# Altium PCB Starboard Deployable Solar Panel.PcbDoc (part 1 of 2)
Units mm, origin at the board's own origin, x right, y up, seen from the top; angles counter-clockwise.
Board outline 327.5 x 81 mm, 2 copper layers (Top Layer, Bottom Layer), stack 1.58 mm thick; 54 components, 32 nets, 176 pads, 1774 vias.
Unrouted connection lines stored in the file: 37.
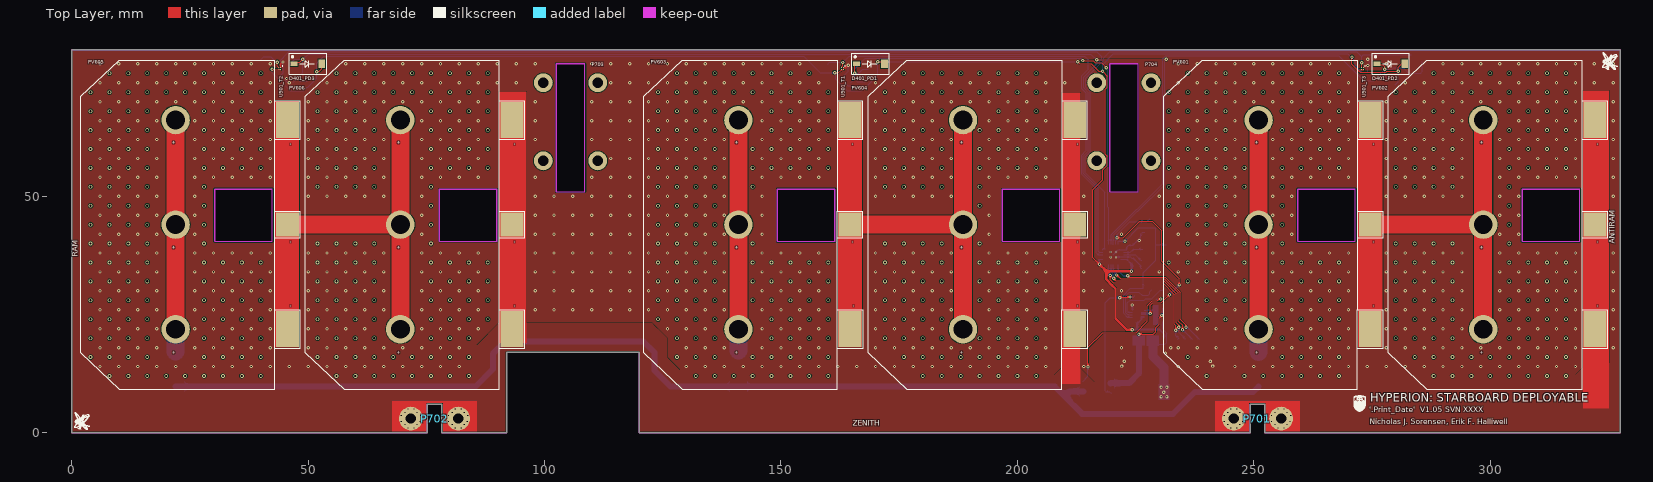
[diagram p0: Top Layer view]
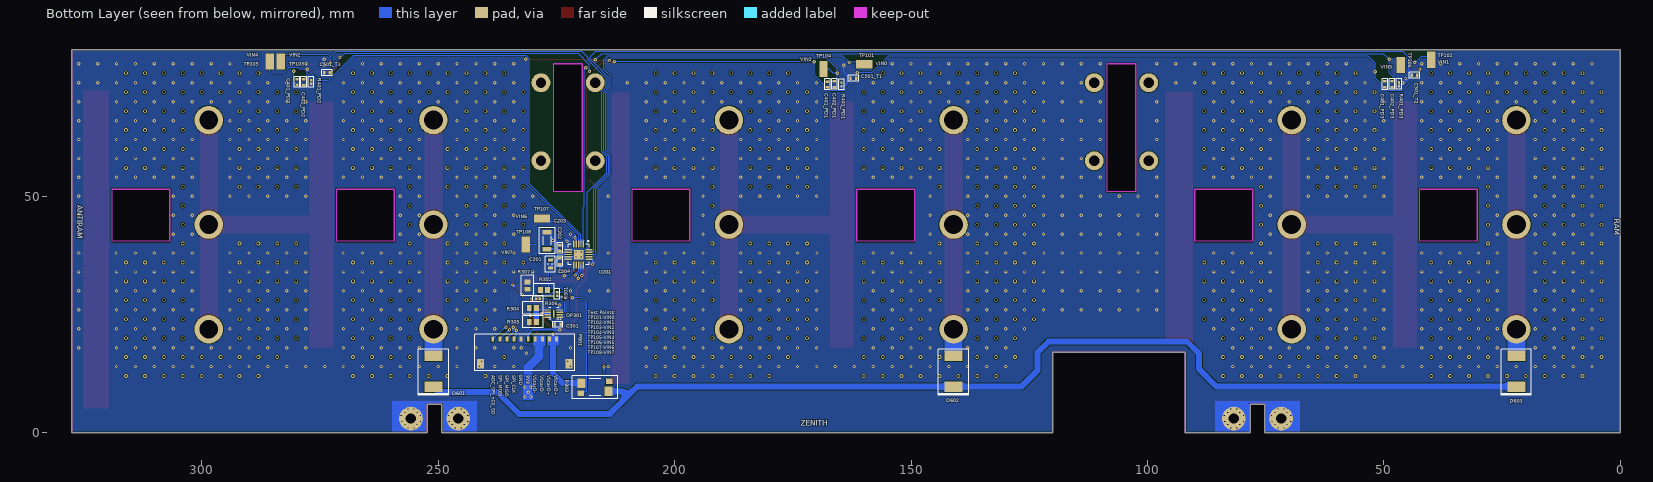
[diagram p1: Bottom Layer view, seen from below]

## Layer stack, top to bottom
Top Solder: solder mask 0.0102, Solder Resist, Dk 3.5
Top Layer: signal copper 0.0711
Dielectric 1: dielectric 1.438, FR-4, Dk 4.8
Bottom Layer: signal copper 0.0711
Bottom Solder: solder mask 0.0102, Solder Resist, Dk 3.5

## Board outline
92,0 92,17 120,17 120,0 249.25,0 249.25,6 252.25,6 252.25,0 327.5,0 327.5,81 0,81 0,0 75.25,0 75.25,6 78.25,6 78.25,0
cut-out: 102.5,80.997
cut-out: 318.9,51.5 306.75,51.5 306.75,40.5 318.9,40.5
cut-out: 271.4,51.5 259.25,51.5 259.25,40.5 271.4,40.5
cut-out: 208.9,51.5 196.75,51.5 196.75,40.5 208.9,40.5
cut-out: 161.4,51.5 149.25,51.5 149.25,40.5 161.4,40.5
cut-out: 89.9,51.5 77.75,51.5 77.75,40.5 89.9,40.5
cut-out: 42.4,51.5 30.25,51.5 30.25,40.5 42.4,40.5
cut-out: 225.5,51 225.5,78 219.5,78 219.5,51
cut-out: 108.5,51 108.5,78 102.5,78 102.5,51

## Design rules (kind name [scope] priority, off if disabled: settings)
BoardOutlineClearance [All] p1: gap=0.254 ignorepadtopadclearanceinfootprint=FALSE except(0: Arc-SplitContinuation Track-SplitContinuation SMDPad-SplitContinuation THPad-SplitContinuation Via-SplitContinuation Fill-SplitContinuation Poly-SplitContinuation Region-SplitContinuation Text-SplitContinuation)
Clearance [All] p1: gap=0.152 ignorepadtopadclearanceinfootprint=FALSE
HoleSize [All] p1: absolutevalues=TRUE maxlimit=6 minlimit=0.2 maxpercent=80.000 minpercent=20.000
MinimumAnnularRing [All] p1: minimumring=0.15
MinimumSolderMaskSliver [All] p1: minsoldermaskwidth=0.127
PlaneConnect [All] p1: planeconnectstyle=Direct reliefexpansion=0.508 reliefentries=4 reliefconductorwidth=0.254 reliefairgap=0.254
PolygonConnect [All] p1: connectstyle=Direct reliefconductorwidth=0.254 reliefentries=4 polygonreliefangle="90 Angle" airgapwidth=0.254
RoutingVias [All] p1: holewidth=0.33 width=0.711 viastyle="Through Hole" minholewidth=0.2 minwidth=0.35 maxholewidth=6.2 maxwidth=7
SilkToSilkClearance [All] p1: silktosilkclearance=0.102
SilkToSolderMaskClearance [IsPad] p1: minsilkscreentomaskgap=0.025 clearancetoexposedcopper=TRUE
SolderMaskExpansion [All] p1: expansion=0.102 istentingtop=FALSE
UnRoutedNet [All] p1: checkbadconnections=TRUE
Width [All] p1: maxlimit=7.62 minlimit=0.203 preferedwidth=0.254
24 further rules are at their usual default settings.

## Classes and differential pairs
component class PD3: C401_PD3 C402_PD3 D401_PD3 R401_PD3
component class PD2: C401_PD2 C402_PD2 D401_PD2 R401_PD2
component class PD1: C401_PD1 C402_PD1 D401_PD1 R401_PD1
channel class Temp_Sensor: T1 T2 T3
channel class Photodiode_Sun_Sensor: T1 T2 T3
component class "Starboard Deployable": TP101 TP102 TP103 TP104 TP105 TP106 TP107 TP108
component class "Starboard Deployable Headers": P801
component class "Photovoltaic Array": D601 D602 D603 PV601 PV602 PV603 PV604 PV605 PV606
component class "Mechanical Interfacing": P701 P702 P703 P704
component class T3: C501_T3 U501_T3
component class T2: C501_T2 U501_T2
component class T1: C501_T1 U501_T1
net class VIN[0..7]: VIN0 VIN1 VIN2 VIN3 VIN4 VIN5 VIN6 VIN7
component class "U_AD7298 12-Bit SPI ADC": C201 C202 C203 C204 U201
component class "Current and Voltage Sensors": C301 OP301 R301 R302 R303 R304 R305 R306 R307

## Components (designator, comment, footprint, x,y, rotation, side; value= is the part's Value field where it differs from the comment)
C201 "" TDK-CGA3E 226.26,35.64 r90 bottom value=1µF
C202 "" TDK-CGA2B 224.25,39.05 r90 bottom value=0.1µF
C203 "" TDK-CGA5L 226.95,40.6 r90 bottom value=10µF
C204 "" TDK-CGA2B 224.25,36.25 r90 bottom value=0.1µF
C301 "Cap" TDK-CGA2B 224.707,22.9 r0 bottom value=0.1µF
C401_PD1 "Cap" TDK-CGA2B 167.7,73.65 r270 bottom value=0.1µF (schematic designator C401)
C401_PD2 "Cap" TDK-CGA2B 279.85,74.165 r270 bottom value=0.1µF (schematic designator C401)
C401_PD3 "Cap" TDK-CGA2B 49.8,73.7 r270 bottom value=0.1µF (schematic designator C401)
C402_PD1 "Cap" TDK-CGA2B 166.2,73.7 r90 bottom value=100pF (schematic designator C402)
C402_PD2 "Cap" TDK-CGA2B 278.4,74.125 r90 bottom value=100pF (schematic designator C402)
C402_PD3 "Cap" TDK-CGA2B 48.3,73.7 r90 bottom value=100pF (schematic designator C402)
C501_T1 "Cap" TDK-CGA2B 162.2,74.95 r180 bottom value=0.1µF (schematic designator C501)
C501_T2 "Cap" TDK-CGA2B 43.55,75.6 r180 bottom value=0.1µF (schematic designator C501)
C501_T3 "Cap" TDK-CGA2B 273.475,76.12 r180 bottom value=0.1µF (schematic designator C501)
D401_PD1 "PDB-C160SMCT-ND" PDB-C160SM 166,78 r0 top (schematic designator D401)
D401_PD2 "PDB-C160SMCT-ND" PDB-C160SM 276,78 r0 top (schematic designator D401)
D401_PD3 "PDB-C160SMCT-ND" PDB-C160SM 47,78 r0 top (schematic designator D401)
D601 "MBRS410L" ONS-875 251,13 r270 bottom
D602 "MBRS410L" ONS-875 141,13 r270 bottom
D603 "MBRS410L" ONS-875 22,13 r270 bottom
OP301 "OPA2333" TI-DSG0008A 225.557,25.2 r0 bottom
P701 "Mounting_Hole" DEPHINGE_MOUNTING_HOLE 245.75,3 r0 top
P702 "Mounting_Hole" DEPHINGE_MOUNTING_HOLE 71.75,3 r0 top
P703 "Switch Depressor" SWITCH_DEPRESSOR 105.5,74 r180 top
P704 "Switch Depressor" SWITCH_DEPRESSOR 222.5,74 r180 top
P801 "WM10138CT-ND" MOLX-5040501091 231.7,19.8 r180 bottom
PV601 "XTJPrime" "XTJ PRIME" 251,44 r270 top
PV602 "XTJPrime" "XTJ PRIME" 298.5,44 r270 top
PV603 "XTJPrime" "XTJ PRIME" 141,44 r270 top
PV604 "XTJPrime" "XTJ PRIME" 188.5,44 r270 top
PV605 "XTJPrime" "XTJ PRIME" 22,44 r270 top
PV606 "XTJPrime" "XTJ PRIME" 69.5,44 r270 top
R301 "0.1% 1/16W" PANA-ERA2A 224.837,29.35 r90 bottom value=6.2k
R302 "0.1% 1/8W" PANA-ERA6A 227.607,30.2 r180 bottom value=1M
R303 "Res Sense" VSH-2512R4C 216.8,9.6 r0 bottom value=0.01
R304 "0.1% 1/8W" PANA-ERA6A 229.957,26.35 r180 bottom value=1M
R305 "0.1% 1/8W" PANA-ERA6A 229.957,23.45 r180 bottom value=845k
R306 "0.1% 1/16W" PANA-ERA2A 228.907,28.325 r180 bottom value=6.2k
R307 "0.1% 1/8W" PANA-ERA6A 231.121,31.1 r90 bottom value=1M
R401_PD1 "0.1% 1/16W" PANA-ERA2A 164.7,73.65 r90 bottom value=24k (schematic designator R401)
R401_PD2 "0.1% 1/16W" PANA-ERA2A 276.85,74.17 r90 bottom value=24k (schematic designator R401)
R401_PD3 "0.1% 1/16W" PANA-ERA2A 46.8,73.7 r90 bottom value=24k (schematic designator R401)
TP101 "5017" KS-5017 159.9,77.95 r180 bottom
TP102 "5017" KS-5017 40,78.85 r90 bottom
TP103 "5017" KS-5017 283.241,78.5 r90 bottom
TP104 "5017" KS-5017 168.5,76.9 r90 bottom
TP105 "5017" KS-5017 285.621,78.5 r90 bottom
TP106 "5017" KS-5017 46.45,77.75 r90 bottom
TP107 "5017" KS-5017 228.052,45.3 r180 bottom
TP108 "5017" KS-5017 231.5,39.772 r270 bottom
U201 "AD7298" ADI-CP-20-8 220.29,37.68 r270 bottom
U501_T1 "LMT70" TI-YFQ0004 163,77 r270 top (schematic designator U501)
U501_T2 "LMT70" TI-YFQ0004 44,77 r270 top (schematic designator U501)
U501_T3 "LMT70" TI-YFQ0004 273,77 r270 top (schematic designator U501)

## Footprints (in the part's own frame and the unit in brackets; to place one, negate y for a bottom-side part, rotate by r counter-clockwise, add the part's x,y. Pads: shape width x height; smd on the part's side, far side on the other; paste and mask are expansions set on the pad)
ADI-CP-20-8 [mm] "QFN, 20-Leads, Body 4.00x4.00mm, Pitch 0.50mm, Thermal Pad 2.55x2.55mm, IPC Low Density"
  rect 1.5x0.3 smd: 1(-2.2,1) 2(-2.2,0.5) 3(-2.2,0) 4(-2.2,-0.5) 5(-2.2,-1) 11(2.2,-1) 12(2.2,-0.5) 13(2.2,0) 14(2.2,0.5) 15(2.2,1)
  rect 0.3x1.5 smd: 6(-1,-2.2) 7(-0.5,-2.2) 8(0,-2.2) 9(0.5,-2.2) 10(1,-2.2) 16(1,2.2) 17(0.5,2.2) 18(0,2.2) 19(-0.5,2.2) 20(-1,2.2)
  rect 2x2 smd: 21(0,0)
  silkscreen extent -2.97,-2.2 2.2,2.2, body extent -2.07,-2.07 2.07,2.07, height 0.8
DEPHINGE_MOUNTING_HOLE [mm]
  round 5 hole 2.2: 1(0,0) 1(10,0)
  Top Layer region: 3.2,-3.2
  Top Layer region: 3.2,-2.7 3.2,3.3 6.8,3.3 6.8,-2.7 13.9,-2.7 13.9,3.8 -3.9,3.8 -3.9,-2.7
  Bottom Layer region: 3.2,-2.7 3.2,3.3 6.8,3.3 6.8,-2.7 13.9,-2.7 13.9,3.8 -3.9,3.8 -3.9,-2.7
KS-5017 [mil] "Testpoint Lug Mini SMD 27X10X152"
  rect 135x70 smd: 1(0,0)
  body extent -53,-20 53,20, height 60
MOLX-5040501091 [mm]
  rect 0.6x1 smd: 1(-6.75,0) 2(-5.25,0) 3(-3.75,0) 4(-2.25,0) 5(-0.75,0) 6(0.75,0) 7(2.25,0) 8(3.75,0) 9(5.25,0) 10(6.75,0)
  oval 0.711x0.711 hole 0.33: M1(-9.605,-5.7) M1(-9.105,-4.7) M2(9.105,-4.7) M2(9.605,-5.7)
  rect 1.5x2 smd: M1(-9.355,-5.2) M2(9.355,-5.2)
  silkscreen extent -10.6,-6.7 10.6,1, body extent -9.77,-6.05 9.78,0.39, height 2.01
ONS-875 [mm]
  rect 2.25x3.79 smd: 1(-3.25,0) 2(3.25,0)
  silkscreen extent -4.7,-3.2 5.1,3.2, body extent -3.98,-2.95 3.98,2.95, height 2.32
PANA-ERA2A [mm] "Chip Resistor, 2-Leads, Body 1.00x0.52mm, IPC High Density"
  rect 0.57x0.5 smd: 1(-0.375,0) 2(0.375,0)
  silkscreen extent -1.1,-0.6 1.1,0.6, body extent -0.55,-0.3 0.55,0.3, height 0.4
PANA-ERA6A [mm] "Chip Resistor, 2-Leads, Body 2.00x1.25mm, IPC High Density"
  rect 1x1.25 smd: 1(-0.75,0) 2(0.75,0)
  silkscreen extent -2.15,-1.3 2.15,1.3, body extent -1.1,-0.67 1.1,0.67, height 0.6
PDB-C160SM [mm] "Photodiode"
  rect 1.45x1 smd: 1(0,0)
  rect 1.45x1.8 smd: 2(5.9,0)
  silkscreen extent -1,-2.2 6.9,2.2
SWITCH_DEPRESSOR [mm]
  round 4 hole 2.2: 10(-5.75,0) 10(5.75,0)
  body extent -7.75,-1.99 7.75,6.81, height 16.47
TDK-CGA2B [mm] "Chip Capacitor, 2-Leads, Body 1.00x0.50mm, IPC Low Density"
  rect 0.52x0.72 smd: 1(-0.6,0) 2(0.6,0)
  silkscreen extent -1.1,-0.6 1.1,0.6, body extent -0.52,-0.28 0.53,0.27, height 0.5
TDK-CGA3E [mm] "Chip Capacitor, 2-Leads, Body 1.60x0.80mm, IPC Low Density"
  rect 0.65x1.05 smd: 1(-0.85,0) 2(0.85,0)
  silkscreen extent -1.7,-1.05 1.7,1.05, body extent -0.85,-0.45 0.85,0.45, height 0.8
TDK-CGA5L [mm] "Chip Capacitor, 2-Leads, Body 3.20x1.60mm, IPC Low Density"
  rect 0.95x1.9 smd: 1(-1.775,0) 2(1.775,0)
  silkscreen extent -2.75,-1.7 2.75,1.7, body extent -1.7,-0.9 1.7,0.9, height 1.6
TI-DSG0008A [mm] "SON, 8-Leads, Body 2.00x2.00mm, Pitch 0.50mm, Thermal Pad 1.60x0.69mm, IPC Low Density"
  rect 1.4x0.3 smd: 1(-1.245,0.75) 2(-1.245,0.25) 3(-1.245,-0.25) 4(-1.245,-0.75) 5(1.245,-0.75) 6(1.245,-0.25) 7(1.245,0.25) 8(1.245,0.75)
  rect 0.4x1.6 smd: 9(0,0)
  silkscreen extent -1.5,-1.2 1.05,1.25, body extent -1.05,-1.05 1.05,1.05, height 0.8
TI-YFQ0004 [mm] "BGA, 4-Leads, Body 0.88x0.88mmx0.68mm, Pitch 0.40mm"
  round 0.21 smd: A1(-0.2,0.2) A2(0.2,0.2) B1(-0.2,-0.2) B2(0.2,-0.2)
  silkscreen extent -0.59,0.5 -0.5,0.6, body extent -0.44,-0.44 0.44,0.44, height 0.67
VSH-2512R4C [mm]
  rect 1.65x2.01 smd: 1(-2.855,0.835) 2(2.855,-0.835)
  rect 1.39x1.14 smd: 3(2.999,1.27) 4(-2.999,-1.27)
  silkscreen extent -4.8,-2.45 4.8,2.45
"XTJ PRIME" [mil] "Spectrolab Solar Cell"
  round 236.22 hole 157.48: 1(-870.5,0) 1(0,0) 1(870.5,0)
  rect 300x190 smd: 2(-870.5,930) 2(870.5,930)
  rect 200x190 smd: 2(0,930)
  silkscreen extent -1369,-790 1369,1038, body extent -1356,-778 1356,778, height 13

## Part data
C201: library part PC-TDK-02603, "CAP CER 1UF 25V X7R 0603", Manufacturer Part Number=CGA3E1X7R1E105K080AC, Supplier Part Number 1=445-6931-1-ND, Temperature Coefficient=X7R, Tolerance=±10%, Voltage - Rated=25V, Applications=Automotive, Index=2603, LatestRevisionDate=3/16/2016, LatestRevisionNote=..., PackageReference="0603 (1608 Metric)", Part Number=PC-TDK-02603, Published=3/16/2016, Publisher=AlbertaSat, Supplier 1=Digi-key, Supplier Link=http://www.digikey.ca/product-search/en?keywords=445-6931-1-ND
C202 C204 C401_PD1 C401_PD2 C401_PD3 C501_T1 C501_T2 C501_T3: library part PC-TDK-02259, "CAP CER 0.1UF 50V X7R 0402", Manufacturer Part Number=CGA2B3X7R1H104K050BB, Supplier Part Number 1=445-6899-1-ND, Temperature Coefficient=X7R, Tolerance=±10%, Voltage - Rated=50V, Applications=Automotive, Index=2259, LatestRevisionNote=..., PackageReference="0402 (1005 Metric)", Part Number=PC-TDK-02259, Publisher=AlbertaSat, Supplier 1=Digi-key, Supplier Link=http://www.digikey.ca/product-search/en?keywords=445-6899-1-ND
  C202 C204: LatestRevisionDate=3/16/2016, Published=3/16/2016
  C401_PD1 C401_PD2 C401_PD3 C501_T1 C501_T2 C501_T3: LatestRevisionDate=2016-03-16, PackageDescription="Radial Cap, Thru-Hole; 2 Leads; 0.3 in Pin Spacing", Published=2016-03-16
C203: library part PC-TDK-02917, "CAP CER 10UF 25V X7R 1206", Manufacturer Part Number=CGA5L1X7R1E106K160AC, Supplier Part Number 1=445-6990-1-ND, Temperature Coefficient=X7R, Tolerance=±10%, Voltage - Rated=25V, Applications=Automotive, Index=2917, LatestRevisionDate=3/16/2016, LatestRevisionNote=..., PackageReference="1206 (3216 Metric)", Part Number=PC-TDK-02917, Published=3/16/2016, Publisher=AlbertaSat, Supplier 1=Digi-key, Supplier Link=http://www.digikey.ca/product-search/en?keywords=445-6990-1-ND
C301: library part PC-TDK-02255, "CAP CER 0.1UF 35V X7R 0402", Manufacturer Part Number=CGA2B3X7R1V104K050BB, Supplier Part Number 1=445-6901-1-ND, Temperature Coefficient=X7R, Tolerance=±10%, Voltage - Rated=35V, Applications=Automotive, Index=2255, LatestRevisionDate=2016-03-16, LatestRevisionNote=..., PackageDescription="Radial Cap, Thru-Hole; 2 Leads; 0.3 in Pin Spacing", PackageReference="0402 (1005 Metric)", Part Number=PC-TDK-02255, Published=2016-03-16, Publisher=AlbertaSat, Supplier 1=Digi-key, Supplier Link=http://www.digikey.ca/product-search/en?keywords=445-6901-1-ND
C402_PD1 C402_PD2 C402_PD3: library part PC-TDK-01227, "CAP CER 100PF 50V C0G 0402", Manufacturer Part Number=CGA2B2C0G1H101J050BA, Supplier Part Number 1=445-5596-1-ND, Temperature Coefficient=NP0, Tolerance=±5%, Voltage - Rated=50V, Applications=Automotive, Index=1227, LatestRevisionDate=2016-03-16, LatestRevisionNote=..., PackageDescription="Radial Cap, Thru-Hole; 2 Leads; 0.3 in Pin Spacing", PackageReference="0402 (1005 Metric)", Part Number=PC-TDK-01227, Published=2016-03-16, Publisher=AlbertaSat, Supplier 1=Digi-key, Supplier Link=http://www.digikey.ca/product-search/en?keywords=445-5596-1-ND
D401_PD1 D401_PD2 D401_PD3: library part PXX-ADP-00000, "SENSOR PHOTODIODE 850NM 2SMD GW", Manufacturer Part Number="Advanced Photonics", Index=1, LatestRevisionDate=3/28/2020, LatestRevisionNote=..., PackageReference=PIN2, Part Number=PXX-ADP-00000, Published=3/28/2020, Publisher=AlbertaSat, Supplier 1=Digi-key, Supplier Part Number 1=PDB-C160SMCT-ND
D601 D602 D603: library part PXX-ONS-00003, "SCHOTTKY BARRIER / RECTIFIERS / 4.0 AMPERES, 10 VOLTS, V_F = 0.31V", Supplier Part Number 1=MBRS410LT3-D, Code_JEDEC=DO-214-AA, Index=3, LatestRevisionDate=1/18/2020, LatestRevisionNote=..., Manufacturer Part Number=MBRS410L, PackageDescription="DO-214-AA/SMB; 2 C-Bend Leads; Body 5.3 x 3.6 mm, inc. leads (LxW)", PackageReference=SMB, Part Number=PXX-ONS-00003, Published=1/18/2020, Publisher=AlbertaSat, Supplier 1=Digi-key, Supplier Link=#https://www.digikey.com/product-detail/en/on-semiconductor/MBRS410LT3G/MBRS410LT3GOSCT-ND/1967073#
OP301: library part 73, "CMOS Amplifier 2 Circuit Rail-to-Rail 8-WSON (2x2)", Manufacturer Part Number=OPA2333PIDSGR, Operating Temperature="-55°C ~ 150°C", Supplier Part Number 1=296-51501-1-ND, Voltage - Supply="1.8V ~ 5.5V, ±0.9V ~ 2.75V", PackageReference="8-WFDFN Exposed Pad", Part Number=73, Supplier 1=Digi-Key, Supplier 2=Mouser, Supplier Link=#https://www.digikey.ca/product-detail/en/texas-instruments/OPA2333PIDSGR/296-51501-1-ND/9745865#, Supplier Part Number 2=595-OPA2333PIDSGR
P701 P702: library part PXX-ABS-00003, "Depolyable Hinge Mounting hole.", Manufacturer Part Number=N/A, Index=3, LatestRevisionNote=..., PackageReference=P?, Part Number=PXX-ABS-00003, Publisher=AlbertaSat, Supplier 1=N/A, Supplier Part Number 1=N/A
P703 P704: library part PXX-ABS-00005, "Hardware for depressing the switch", Manufacturer Part Number=Custom, Index=5, LatestRevisionNote=..., Part Number=PXX-ABS-00005, Publisher=AlbertaSat, Supplier 1=Digi-key
P801: library part 69, "CONN HEADER SMD R/A 10POS 1.5MM", Manufacturer Part Number=5040501091, LatestRevisionDate=17-Jul-2002, LatestRevisionNote="Re-released for DXP Platform.", Part Number=69, Publisher="Altium Limited", Supplier 1=Digi-Key, Supplier Link=#https://www.digikey.ca/product-detail/en/molex/5040501091/WM10138CT-ND/4357655#, Supplier Part Number 1=WM10138CT-ND
PV601 PV602 PV603 PV604 PV605 PV606: library part PBT-SPEC-00002, Manufacturer Part Number=Spectrolab, Supplier Part Number 1="UTJ CIC 26.26cm^2", Index=2, LatestRevisionNote=..., PackageReference="3-Connector Solar Cell", Part Number=PBT-SPEC-00002, Publisher=AlbertaSat, Supplier 1=Spectrolab
R301 R306: library part 16853, "RES SMD 6.2K OHM 0.1% 1/16W 0402", Manufacturer Part Number=ERA-2APB622X, Power="0.063W, 1/16W", Supplier Part Number 1=P6.2KCNCT-ND, Temperature Coefficient=±15ppm/°C, Tolerance=±0.1%, LatestRevisionDate=29-May-2009, LatestRevisionNote="IPC-7351 Footprint Added.", PackageDescription="Chip Resistor, 2-Leads, Body 1.00x0.50mm, IPC Low Density", PackageReference="0402 (1005 Metric)", Part Number=16853, Published=8-Jun-2000, Publisher="Altium Limited", Supplier 1=Digi-Key, Supplier Link=http://www.digikey.ca/product-search/en?keywords=P6.2KCNCT-ND
R302 R304 R307: library part 19706, "RES SMD 1M OHM 0.1% 1/8W 0805", Manufacturer Part Number=ERA-6AEB105V, Power="0.125W, 1/8W", Supplier Part Number 1=P1MDACT-ND, Temperature Coefficient=±25ppm/°C, Tolerance=±0.1%, LatestRevisionDate=29-May-2009, LatestRevisionNote="IPC-7351 Footprint Added.", PackageDescription="Chip Resistor, 2-Leads, Body 2.00x1.25mm, IPC Low Density", PackageReference="0805 (2012 Metric)", Part Number=19706, Published=8-Jun-2000, Publisher="Altium Limited", Supplier 1=Digi-Key, Supplier Link=http://www.digikey.ca/product-search/en?keywords=P1MDACT-ND
R303: library part PR-VSH-00237, "RES SMD 0.01 OHM 0.1% 1W 2512", Manufacturer Part Number=Y14870R01000B9W, Power - Rated=1W, Supplier Part Number 1=Y1487-.01-ND, Temperature Coefficient=±15ppm/°C, Tolerance=±0.1%, Applications=Automotive, Index=237, LatestRevisionDate=2017-07-12, LatestRevisionNote=..., PackageReference=VSH-2512R4C, Part Number=PR-VSH-00237, Published=2017-07-12, Publisher=AlbertaSat, Supplier 1=Digi-key, Supplier Link=http://www.digikey.ca/product-search/en?keywords=Y1487-.01-ND
R305: library part 19643, "RES SMD 845K OHM 0.1% 1/8W 0805", Manufacturer Part Number=ERA-6AEB8453V, Power="0.125W, 1/8W", Supplier Part Number 1=P845KDACT-ND, Temperature Coefficient=±25ppm/°C, Tolerance=±0.1%, LatestRevisionDate=29-May-2009, LatestRevisionNote="IPC-7351 Footprint Added.", PackageDescription="Chip Resistor, 2-Leads, Body 2.00x1.25mm, IPC Low Density", PackageReference="0805 (2012 Metric)", Part Number=19643, Published=8-Jun-2000, Publisher="Altium Limited", Supplier 1=Digi-Key, Supplier Link=http://www.digikey.ca/product-search/en?keywords=P845KDACT-ND
R401_PD1 R401_PD2 R401_PD3: library part 17830, "RES SMD 24K OHM 0.1% 1/16W 0402", Manufacturer Part Number=ERA-2APB243X, Power="0.063W, 1/16W", Supplier Part Number 1=P24KCNCT-ND, Temperature Coefficient=±15ppm/°C, Tolerance=±0.1%, LatestRevisionDate=29-May-2009, LatestRevisionNote="IPC-7351 Footprint Added.", PackageDescription="Chip Resistor, 2-Leads, Body 1.00x0.50mm, IPC Low Density", PackageReference="0402 (1005 Metric)", Part Number=17830, Published=8-Jun-2000, Publisher="Altium Limited", Supplier 1=Digi-Key, Supplier Link=http://www.digikey.ca/product-search/en?keywords=P24KCNCT-ND
TP101 TP102 TP103 TP104 TP105 TP106 TP107 TP108: library part PTP-KS-00001, "PC TEST POINT MINI SMD", Supplier Part Number 1=36-5017CT-ND, Index=1, LatestRevisionDate=3/15/2016, LatestRevisionNote=..., Manufacturer Part Number=5017, PackageDescription="Testpoint Lug Mini SMD 27X10X152", PackageReference=KS-5017, Part Number=PTP-KS-00001, Published=3/15/2016, Publisher=AlbertaSat, Supplier 1=Digi-key, Supplier 2=Newark, Supplier 3=Mouser, Supplier Link=http://www.digikey.ca/product-detail/en/keystone-electronics/5017/36-5017TR-ND/2217304
U201: library part PU-ADI-00007, "IC ADC 12BIT SAR 20LFCSP-WQ", Manufacturer Part Number=AD7298BCPZ, Supplier Part Number 1=AD7298BCPZ-ND, Index=7, LatestRevisionDate=7/16/2019, LatestRevisionNote=..., PackageDescription="QFN, 20-Leads, Body 4.00x4.00mm, Pitch 0.50mm, Thermal Pad 2.55x2.55mm, IPC Low Density", PackageReference="20-WFQFN Exposed Pad", Part Number=PU-ADI-00007, Published=7/16/2019, Publisher=AlbertaSat, Supplier 1=Digi-key, Supplier 2=Mouser, Supplier Link=#https://www.digikey.ca/product-detail/en/analog-devices-inc/AD7298BCPZ/AD7298BCPZ-ND/2507320#, Supplier Part Number 2=584-AD7298BCPZ
U501_T1 U501_T2 U501_T3: library part 70, "Temperature Sensor Analog, Local -55°C ~ 150°C 5.194mV/°C 4-DSBGA (0.81x0.81)", Manufacturer Part Number=LMT70YFQR, Operating Temperature="-55°C ~ 150°C", Supplier Part Number 1=296-47337-1-ND, PackageReference="BGA, 4-Leads, Body 0.88x0.88mmx0.68mm, Pitch 0.40mm", Part Number=70, Supplier 1=Digi-Key, Supplier Link=#https://www.digikey.ca/product-detail/en/texas-instruments/LMT70YFQR/296-47337-1-ND/7688347#

## Free pads (board coordinates)
  round 4 hole 2.2: 3(99.75,57.5) 3(111.25,57.5) 3(216.75,57.5) 3(228.25,57.5)

## Via types
v1: diameter 0.711, hole 0.3, Top Layer to Bottom Layer, tented both sides, 995 vias
v2: diameter 0.8, hole 0.5, Top Layer to Bottom Layer, 727 vias
v3: diameter 0.655, hole 0.25, Top Layer to Bottom Layer, 48 vias
v4: diameter 0.5, hole 0.2, Top Layer to Bottom Layer, 4 vias

## Nets (pads, with @x,y where several pads share a name; then routed paths per layer and width w, separated by ;. In a path a pad name is that pad's centre, name@x,y a point inside that pad or via, vN(x,y) a via of type N, cw(c..) or ccw(c..) an arc to the next point about the centre after c; other vN are vias at no path point)
3V3: C204.1 C301.2 C401_PD1.2 C401_PD2.2 C401_PD3.2 C501_T1.2 C501_T2.2 C501_T3.2 D401_PD1.2 D401_PD2.2 D401_PD3.2 OP301.8 P801.6 U201.10 U201.16 U501_T1.A2 U501_T1.B2 U501_T2.A2 U501_T2.B2 U501_T3.A2 U501_T3.B2 | length 362.2
  Top Layer w0.203: v1(42.384,76.865) 42.449,76.8 U501_T2.B2 U501_T2.A2 ; v1@161.25,76.15 v1(161.35,76.15) 162.15,76.15 U501_T1.B2 U501_T1.A2 ; 270.75,78.742 v1(270.75,79.4) ; 271.9,76.8 271.905,76.8 U501_T3.B2 U501_T3.A2
  Top Layer w0.254: v1(51.8,76.35) 51.887,76.437 52.387,76.437 52.9,76.95 D401_PD3.2 ; v1(170.497,78.429) 171.471,78.429 D401_PD1.2 ; v1(212.77,78.429) 213.199,78 215.6,78 217.2,76.4 v1(218,76.4) 219.029,75.37 219.029,73.056 218.621,72.648 218.621,58.852 219.029,58.444 219.029,56.556 218.056,55.583 218.056,53.506 215.95,51.4 215.95,37 v1(217.35,35.6) ; 270.75,78.742 270.75,77.955 271.905,76.8 272.491,76.214 277.963,76.214 278.149,76.4 280.55,76.4 280.55,77.25 281.3,78 D401_PD2.2
  Top Layer w0.508: v1(217.35,35.6) 218.8,34.15 ; v1(224.117,34.15) 218.8,34.15 ; v1(224.307,21.8) 223.1,21.8 220.744,24.156 220.744,30.456 220.033,31.167 220.031,31.167 218.8,32.398 218.8,34.15
  Bottom Layer w0.254: v1(42.384,76.865) 42.384,76.116 42.875,75.625 42.925,75.625 C501_T2.2 44.642,73.908 44.642,73.858 46.2,72.3 48.95,72.3 49.75,73.1 49.9,73.1 51.8,75 v1(51.8,76.35) 51.8,78.11 53.318,79.628 154.85,79.628 158.328,76.15 v1(161.35,76.15) 161.35,76.026 161.6,75.776 161.6,74.7 164,72.3 167.025,72.3 167.775,73.05 167.875,73.05 170.497,75.672 v1(170.497,78.429) v1(212.77,78.429) ; 217.25,36.5 217.25,36.678 218.088,36.678 U201.16 ; v1(218,76.4) 218,77.841 220.302,80.144 264.933,80.144 269.856,80.144 v1@270.675,79.325 ; U201.10@221.895,36.682 221.897,36.68 U201.10 223.111,36.68 224.008,35.783 224.117,35.783 C204.1 C204.1@224.184,35.584 ; v1(224.117,34.15) v1@224.184,34.217 ; v1(270.75,79.4) 270.75,79.25 271.45,78.55 271.45,77.645 272.85,76.245 C501_T3.2@272.85,76.1 ; C401_PD2.2 280.55,74.265 v1(280.55,76.465)
  Bottom Layer w0.381: v1(224.307,21.8) 225.307,21.8 ; OP301.8 226.231,24.45 226.229,24.448 226.229,24.005 225.307,23.083 C301.2 225.307,21.8 ; P801.6@231.05,20 231.05,20.85 230.1,21.8 225.307,21.8
  Bottom Layer w0.508: 217.25,36.5 217.25,35.7 v1(217.35,35.6) ; v1@224.184,34.217 C204.1@224.184,35.584
ADC_SPI_nCS_SD: P801.1 U201.11 | length 28.2
  Top Layer w0.254: v1@223.167,33.35 v1(223.317,33.2) 223.598,32.919 231.23,32.919 234.426,29.723 234.426,23.974 235.65,22.75 v1(235.65,22.3)
  Bottom Layer w0.254: U201.11 221.29,34.26 222.35,33.2 v1(223.317,33.2) ; v1(235.65,22.3) 235.95,22.3 P801.1
GND: C201.1 C202.2 C203.2 C204.2 C301.1 C402_PD1.1 C402_PD2.1 C402_PD3.1 C501_T1.1 C501_T2.1 C501_T3.1 OP301.4 P801.5 P801.M1 P801.M2 R307.2 R401_PD1.1 R401_PD2.1 R401_PD3.1 U201.6 U201.9 U201.21 U501_T1.A1 U501_T2.A1 U501_T3.A1 | length 39.1
  Top Layer w0.203: U501_T2.A1 44.2,77.976 44.6,78.376 v1@44.6,78.5 ; U501_T1.A1 163.708,77.2 164.208,77.7 v1(164.25,77.7)
  Bottom Layer w0.254: v1(44.7,78.4) 44.7,76.1 44.2,75.6 44.2,75.5 46.5,73.2 46.703,73.2 46.85,73.347 46.85,73.325 46.962,73.212 48.238,73.212 C402_PD3.1@48.35,73.1 ; v1(164.25,77.7) 164.25,76.4 C501_T1.1 162.8,74.7 164.144,73.356 164.693,73.356 164.887,73.163 166.162,73.163 C402_PD1.1@166.275,73.05 ; U201.21 221.29,38.68 U201.6 223.111,38.68 223.113,38.682 223.113,39.254 223.509,39.65 C202.2 224.35,39.65 226.127,41.427 226.127,42.027 226.475,42.375 C203.2 ; v4(220.84,37.13) 220.89,37.18 U201.9 223.82,37.18 224.15,36.85 C204.2 224.53,36.85 226.06,35.32 226.06,34.79 C201.1 C201.1@226.29,34.76 ; v1(224.307,27) 224.307,25.952 224.309,25.95 OP301.4 ; C501_T3.1@274.05,76.1 v1(274.05,77.65) 274.45,78.05 274.45,79
  other v1: 6,14 10,14 14,14 18,14 22,14 26,14 30,14 34,14 38,14 42,14 46,14 50,14 54,14 58,14 62,14 66,14 70,14 74,14 78,14 82,14 130,14 134,14 138,14 142,14 146,14 150,14 154,14 158,14 162,14 166,14 170,14 174,14 178,14 182,14 186,14 190,14 194,14 198,14 202,14 206,14 214,14 234,14 238,14 246,14 250,14 254,14 258,14 262,14 266,14 270,14 274,14 278,14 282,14 286,14 290,14 294,14 298,14 302,14 306,14 310,14 314,14 318,14 231.3,16.8 232.398,17.95 6,18 10,18 14,18 18,18 26,18 30,18 34,18 38,18 42,18 50,18 54,18 58,18 62,18 66,18 70,18 74,18 78,18 82,18 130,18 134,18 138,18 146,18 150,18 154,18 158,18 170,18 174,18 178,18 182,18 186,18 190,18 194,18 198,18 202,18 206,18 222,18 234,18 238,18 242,18 246,18 254,18 258,18 262,18 266,18 270,18 278,18 282,18 286,18 290,18 294,18 298,18 302,18 306,18 310,18 314,18 318,18 326,18 6,22 10,22 14,22 18,22 26,22 30,22 34,22 38,22 42,22 50,22 54,22 58,22 62,22 74,22 78,22 82,22 86,22 126,22 130,22 134,22 146,22 150,22 154,22 158,22 170,22 174,22 178,22 182,22 194,22 198,22 202,22 206,22 238,22 242,22 246,22 258,22 262,22 266,22 270,22 278,22 282,22 286,22 290,22 294,22 306,22 310,22 314,22 318,22 326,22 6,26 10,26 14,26 18,26 26,26 30,26 34,26 38,26 42,26 50,26 54,26 58,26 62,26 66,26 74,26 78,26 82,26 86,26 98,26 102,26 106,26 110,26 114,26 118,26 122,26 126,26 130,26 134,26 138,26 146,26 150,26 154,26 158,26 170,26 174,26 178,26 182,26 186,26 194,26 198,26 202,26 206,26 238,26 242,26 246,26 254,26 258,26 262,26 266,26 270,26 278,26 282,26 286,26 290,26 294,26 302,26 306,26 310,26 314,26 318,26 326,26 6,30 10,30 14,30 18,30 26,30 30,30 34,30 38,30 42,30 50,30 54,30 58,30 62,30 66,30 74,30 78,30 82,30 86,30 98,30 102,30 106,30 110,30 114,30 118,30 122,30 126,30 130,30 134,30 138,30 146,30 150,30 154,30 158,30 170,30 174,30 178,30 182,30 186,30 194,30 198,30 202,30 206,30 214,30 218,30 222,30 238,30 242,30 246,30 254,30 258,30 262,30 266,30 270,30 278,30 282,30 286,30 290,30 294,30 302,30 306,30 310,30 314,30 318,30 326,30 6,34 10,34 14,34 18,34 26,34 30,34 34,34 38,34 42,34 50,34 54,34 58,34 62,34 66,34 74,34 78,34 82,34 86,34 98,34 102,34 106,34 110,34 114,34 118,34 122,34 126,34 130,34 134,34 138,34 146,34 150,34 154,34 158,34 170,34 174,34 178,34 182,34 186,34 194,34 198,34 202,34 206,34 214,34 230,34 234,34 238,34 242,34 246,34 254,34 258,34 262,34 266,34 270,34 278,34 282,34 286,34 290,34 294,34 302,34 306,34 310,34 314,34 318,34 326,34 6,38 10,38 14,38 18,38 26,38 30,38 34,38 38,38 42,38 50,38 54,38 58,38 62,38 66,38 74,38 78,38 82,38 86,38 98,38 102,38 106,38 110,38 114,38 118,38 122,38 126,38 130,38 134,38 138,38 146,38 150,38 154,38 158,38 170,38 174,38 178,38 182,38 186,38 194,38 198,38 202,38 206,38 214,38 234,38 238,38 242,38 246,38 254,38 258,38 262,38 266,38 270,38 278,38 282,38 286,38 290,38 294,38 302,38 306,38 310,38 314,38 318,38 326,38 225.75,40.641 6,42 10,42 14,42 18,42 26,42 74,42 98,42 102,42 106,42 110,42 114,42 118,42 122,42 126,42 130,42 134,42 138,42 146,42 194,42 222,42 234,42 238,42 242,42 246,42 254,42 258,42 302,42 306,42 326,42 6,46 10,46 14,46 18,46 26,46 74,46 98,46 102,46 106,46 110,46 114,46 118,46 122,46 126,46 130,46 134,46 138,46 146,46 194,46 234,46 238,46 242,46 246,46 254,46 258,46 302,46 306,46 326,46 6,50 10,50 14,50 18,50 26,50 50,50 54,50 58,50 62,50 66,50 74,50 98,50 102,50 106,50 110,50 114,50 118,50 122,50 126,50 130,50 134,50 138,50 146,50 170,50 174,50 178,50 182,50 186,50 194,50 214,50 230,50 234,50 238,50 242,50 246,50 254,50 258,50 278,50 282,50 286,50 290,50 294,50 302,50 306,50 326,50 6,54 10,54 14,54 18,54 26,54 30,54 34,54 38,54 42,54 50,54 54,54 58,54 62,54 66,54 74,54 78,54 82,54 86,54 98,54 110,54 114,54 118,54 122,54 126,54 130,54 134,54 138,54 146,54 150,54 154,54 158,54 170,54 174,54 178,54 182,54 186,54 194,54 198,54 202,54 206,54 234,54 238,54 242,54 246,54 254,54 258,54 262,54 266,54 270,54 278,54 282,54 286,54 290,54 294,54 302,54 306,54 310,54 314,54 318,54 326,54 6,58 10,58 14,58 18,58 26,58 30,58 34,58 38,58 42,58 50,58 54,58 58,58 62,58 66,58 74,58 78,58 82,58 86,58 114,58 118,58 122,58 126,58 130,58 134,58 138,58 146,58 150,58 154,58 158,58 170,58 174,58 178,58 182,58 186,58 194,58 198,58 202,58 206,58 234,58 238,58 242,58 246,58 254,58 258,58 262,58 266,58 270,58 278,58 282,58 286,58 290,58 294,58 302,58 306,58 310,58 314,58 318,58 326,58 6,62 10,62 14,62 18,62 26,62 30,62 34,62 38,62 42,62 50,62 54,62 58,62 62,62 66,62 74,62 78,62 82,62 86,62 98,62 110,62 114,62 118,62 122,62 126,62 130,62 134,62 138,62 146,62 150,62 154,62 158,62 170,62 174,62 178,62 182,62 186,62 194,62 198,62 202,62 206,62 234,62 238,62 242,62 246,62 254,62 258,62 262,62 266,62 270,62 278,62 282,62 286,62 290,62 294,62 302,62 306,62 310,62 314,62 318,62 326,62 6,66 10,66 14,66 18,66 26,66 30,66 34,66 38,66 42,66 50,66 54,66 58,66 62,66 74,66 78,66 82,66 86,66 98,66 110,66 114,66 118,66 122,66 126,66 130,66 134,66 146,66 150,66 154,66 158,66 170,66 174,66 178,66 182,66 194,66 198,66 202,66 206,66 234,66 238,66 242,66 246,66 258,66 262,66 266,66 270,66 278,66 282,66 286,66 290,66 294,66 306,66 310,66 314,66 318,66 326,66 6,70 10,70 14,70 18,70 22,70 26,70 30,70 34,70 38,70 42,70 50,70 54,70 58,70 62,70 66,70 70,70 74,70 78,70 82,70 86,70 98,70 110,70 114,70 118,70 122,70 126,70 130,70 134,70 138,70 142,70 146,70 150,70 154,70 158,70 170,70 174,70 178,70 182,70 186,70 190,70 194,70 198,70 202,70 206,70 234,70 238,70 242,70 246,70 250,70 254,70 258,70 262,70 266,70 270,70 278,70 282,70 286,70 290,70 294,70 298,70 302,70 306,70 310,70 314,70 318,70 326,70 6,74 10,74 14,74 18,74 22,74 26,74 30,74 34,74 38,74 42,74 46,74 54,74 58,74 62,74 66,74 70,74 74,74 78,74 82,74 86,74 90,74 94,74 114,74 118,74 122,74 126,74 130,74 134,74 138,74 142,74 146,74 150,74 154,74 158,74 170,74 174,74 178,74 182,74 186,74 190,74 194,74 198,74 202,74 206,74 210,74 234,74 238,74 242,74 246,74 250,74 254,74 258,74 262,74 266,74 270,74 282,74 286,74 290,74 294,74 298,74 302,74 306,74 310,74 314,74 318,74 322,74 326,74 45.45,74.9 6,78 10,78 14,78 18,78 22,78 26,78 30,78 34,78 38,78 42,78 58,78 62,78 66,78 70,78 74,78 78,78 82,78 86,78 90,78 94,78 98,78 110,78 114,78 118,78 122,78 126,78 130,78 134,78 138,78 142,78 146,78 150,78 154,78 234,78 238,78 242,78 246,78 250,78 254,78 258,78 262,78 266,78 278,78 290,78 294,78 298,78 302,78 306,78 310,78 314,78 318,78 322,78 326,78 274.05,78.95
  other v4: 219.74,37.13 219.74,38.23 220.84,38.23
NetC201_2: C201.2 U201.8 | length 4.3
  Bottom Layer w0.254: U201.8 224.87,37.68 226.06,36.49 C201.2
NetC202_1: C202.1 C203.1 U201.7 | length 4.3
  Bottom Layer w0.254: U201.7 223.88,38.18 224.15,38.45 C202.1 224.635,38.835 C203.1@226.525,38.835
NetD601_1: D601.1 PV601.1 | length 49.9
  Top Layer w3.81: PV601.1@251,21.889 251,44 PV601.1@251,66.111
  Bottom Layer w0.254: D601.1 D601.1@251,17.1
  Bottom Layer w3.81: D601.1@251,17.1 PV601.1@251,21.889
NetD602_1: D602.1 PV603.1 | length 48.8
  Top Layer w3.81: PV603.1@141,21.889 141,44 PV603.1@141,66.111
  Bottom Layer w3.81: D602.1@141,17.35 PV603.1@141,21.889
NetD603_1: D603.1 PV605.1 | length 49.9
  Top Layer w3.81: PV605.1@22,21.889 22,44 PV605.1@22,66.111
  Bottom Layer w0.254: D603.1 D603.1@22,17.2
  Bottom Layer w3.81: D603.1@22,17.2 PV605.1@22,21.889
NetOP301_2: OP301.2 R301.2 R302.1 | length 12
  Bottom Layer w0.254: OP301.2 224.31,24.952 223.317,24.952 222.856,25.413 222.856,28.881 223.7,29.725 R301.2 225.695,29.725 226.37,29.05 227.657,29.05 228.004,29.397 228.004,29.847 R302.1
NetOP301_3: OP301.3 R306.2 R307.1 | length 12
  Bottom Layer w0.254: OP301.3 224.31,25.452 223.392,25.452 223.263,25.581 223.263,27.455 223.807,28 226.782,28 227.107,28.325 228.352,28.325 230.154,30.127 230.677,30.127 R307.1@231.05,30.5
NetOP301_5: OP301.5 R304.2 R305.2 | length 2.6
  Bottom Layer w0.254: OP301.5 228.834,25.95 229.207,26.323 R304.2
NetPV601_2: PV601.2 PV602.1 | length 67.7
  Top Layer w3.81: PV601.2@275,44 275.892,44 PV602.1@298.5,44 ; PV602.1@298.5,21.889 PV602.1@298.5,44 ; PV602.1@298.5,66.111 PV602.1@298.5,44
NetPV603_2: PV603.2 PV604.1 | length 68.1
  Top Layer w3.81: PV603.2@164.622,44 PV604.1@188.5,44 ; PV604.1@188.5,21.889 PV604.1@188.5,44 ; PV604.1@188.5,66.111 PV604.1@188.5,44
NetPV605_2: PV605.2 PV606.1 | length 68.1
  Top Layer w3.81: PV605.2@45.622,44 PV606.1@69.5,44 ; PV606.1@69.5,21.889 PV606.1@69.5,44 ; PV606.1@69.5,66.111 PV606.1@69.5,44
NetR301_1: R301.1 R303.3 | length 27
  Top Layer w0.254: v1(221.6,28.55) 221.75,28.7 v1(223.8,28.7)
  Bottom Layer w0.254: R303.3 219.45,8.679 218.699,8.679 218.551,8.828 218.551,27.451 219.65,28.55 v1(221.6,28.55) ; v1(223.8,28.7) 224.562,28.7 224.679,28.817 224.714,28.817 224.837,28.94 R301.1
NetR303_4: R303.4 R306.1 | length 30.4
  Top Layer w0.254: v1(214.923,13.975) 214.923,18.023 218.05,21.15 225.102,21.15 227.472,23.52 227.472,26.847 228.482,27.856 229.606,27.856 v1@230.25,28.5
  Bottom Layer w0.254: R303.4 213.926,10.87 214.369,11.313 214.369,11.438 214.923,11.992 v1(214.923,13.975) ; R306.1 229.332,28.275 v1(230.325,28.275)
NetU201_12: U201.12
NetU201_17: U201.17
SPI_CLK: P801.4 U201.15 | length 28
  Top Layer w0.254: v1(219.65,33.25) 219.65,32.302 220.252,31.7 230.725,31.7 233.206,29.218 233.206,22.887 233.5,22.594 v1(233.5,21.65)
  Bottom Layer w0.254: U201.15 219.29,33.627 219.65,33.267 v1(219.65,33.25) ; v1(233.5,21.65) 233.5,20.55 234.1,19.95 P801.4
SPI_MISO: P801.3 U201.14 | length 28.2
  Top Layer w0.254: v1(220.4,32.65) 220.4,32.45 220.744,32.106 230.893,32.106 233.613,29.387 233.613,23.237 234.15,22.7 v1(234.15,22.3)
  Bottom Layer w0.254: U201.14@219.788,35.478 U201.14 219.79,34.008 220.285,33.513 220.285,33.027 220.313,33 220.313,32.737 v1(220.4,32.65) ; v1(234.15,22.3) 234.15,21.2 235.5,19.85 P801.3
SPI_MOSI: P801.2 U201.13 | length 28.1
  Top Layer w0.254: v1(220.95,33.35) 221,33.35 221.837,32.513 231.061,32.513 234.019,29.555 234.019,23.581 234.913,22.687 234.913,21.737 v1(234.9,21.75)
  Bottom Layer w0.254: U201.13 220.29,34.16 220.95,33.5 v1(220.95,33.35) ; v1(234.9,21.75) 235,21.75 P801.2
V+: D601.2 D602.2 D603.2 R303.1 | length 250.2
  Bottom Layer w1.27: D603.2 85.4,9.75 89.15,13.5 89.15,16.8 91.65,19.3 120.9,19.3 123.288,16.912 123.288,13.112 126.65,9.75 D602.2 207.95,9.75 209.95,7.75 ; R303.1 210.965,8.765 209.95,7.75 ; D601.2 249.85,8.6 237.5,8.6 232.9,4 213.7,4 209.95,7.75
V-: P801.7 P801.8 PV602.2 PV604.2 PV606.2 R305.1 | length 20
  Bottom Layer w0.254: 228.7,19.55 229.55,18.7 231.181,18.7 231.529,19.049 231.529,21.035 230.707,21.857 R305.1
  Bottom Layer w1.905: 228.7,19.55 228.7,18.7 228.7,16.09 230.97,13.82 230.97,9.59 v1(230.97,8.54)
  other v1: 230.37,7.59 231.62,7.59 230.37,9.59 231.62,9.59
V_out: P801.9 P801.10 R303.2 R304.1 | length 24.6
  Top Layer w0.254: v1(225.7,20.85) 228.75,20.85 229.25,21.35 229.25,22.2 229.95,22.9 229.95,24.2 v1(230.55,24.8)
  Bottom Layer w0.254: 225.7,19.6 v1(225.7,20.85) ; v1(230.55,24.8) 230.55,24.924 230.707,25.081 R304.1
  Bottom Layer w1.27: R303.2 219.72,10.5 223.65,10.5 225.7,12.55 225.7,19.6
VIN0: TP101.1 U201.18 U501_T1.B1 | length 102.5
  Top Layer w0.203: U501_T1.B1 162.8,77.344 163.02,77.563 163.02,78.22 v1(163.1,78.3)
  Bottom Layer w0.254: TP101.1 160.25,78.3 v1(163.1,78.3) 164.429,79.629 214.213,79.629 215.006,78.836 215.006,76.905 213.587,75.486 213.587,72.763 214.6,71.751 214.6,59.723 213.55,58.673 213.55,54.65 216.654,51.546 216.654,38.021 216.993,37.682 218.088,37.682 U201.18
VIN1: TP102.1 U201.19 U501_T2.B1 | length 227.2
  Top Layer w0.203: v1@43.5,78.5 43.5,77.5 U501_T2.B1
  Bottom Layer w0.254: TP102.1 40.635,79.485 42.115,79.485 43.227,78.373 v1(43.5,78.373) 43.773,78.373 45.943,80.543 216.757,80.543 217.808,79.492 217.808,79.008 216.356,77.556 216.338,77.556 213.994,75.212 213.994,72.932 215.006,71.919 215.006,59.555 213.956,58.505 213.956,54.818 217.061,51.714 217.061,38.414 217.272,38.203 218.067,38.203 U201.19
VIN2: TP103.1 U201.20 U501_T3.B1 | length 113.4
  Top Layer w0.203: U501_T3.B1 v1(272.8,78.25)
  Bottom Layer w0.254: U201.20 218.45,39.04 218.45,50.899 214.363,54.987 214.363,58.336 215.413,59.386 215.413,72.087 214.4,73.1 214.4,74.95 216.242,76.792 218.215,78.765 218.215,79.289 219.475,80.55 222.4,80.55 227.9,80.55 269.05,80.55 271.8,80.55 272.8,79.55 ; v1(272.8,78.25) 272.8,79.55 ; TP103.1@283.241,79.92 273.17,79.92 272.8,79.55
VIN3: C401_PD1.1 C402_PD1.2 D401_PD1.1 R401_PD1.2 TP104.1 U201.1 | length 103.6
  Top Layer w0.254: v1(165.6,76.05) 165.6,77.627 165.973,78 D401_PD1.1 ; v1(213.8,78.7) 216.009,78.7 216.492,78.218 217.782,78.218 v1(218.8,77.2)
  Bottom Layer w0.254: R401_PD1.2@164.775,74.05 165.575,74.85 ; v1(165.6,76.05) 166.421,76.05 167.271,76.9 TP104.1 ; C401_PD1.1@167.775,74.25 C401_PD1.1 166.275,74.25 166.175,74.25 165.575,74.85 ; v1(213.8,78.7) 213.8,78.811 213.44,79.171 167.771,79.171 165.575,76.975 165.575,74.85 ; v1(218.8,77.2) 218.8,77.076 219.094,76.783 219.094,47.832 219.29,47.635 U201.1
VIN4: C401_PD2.1 C402_PD2.2 D401_PD2.1 R401_PD2.2 TP105.1 U201.2 | length 112.6
  Top Layer w0.254: D401_PD2.1@276.25,77.825 277.275,77.825 277.7,77.4 v1(277.7,76.849)
  Bottom Layer w0.254: U201.2 219.788,39.882 219.788,41.836 225.19,47.237 225.312,47.237 230.714,52.639 230.714,79.121 231.33,79.737 267.913,79.737 273.2,74.45 275.301,74.45 v1(277.7,76.849) ; R401_PD2.2@276.75,74.5 277.7,75.45 ; C401_PD2.1@279.75,74.7 278.25,74.7 278.25,74.6 278.215,74.635 278.215,74.935 277.7,75.45 ; TP105.1 285.621,76.392 285.255,76.026 282.716,76.026 281.574,77.169 279.545,77.169 279.225,76.849 v1(277.7,76.849) ; 277.7,75.45 v1(277.7,76.849)
VIN5: C401_PD3.1 C402_PD3.2 D401_PD3.1 R401_PD3.2 TP106.1 U201.3 | length 241
  Top Layer w0.254: D401_PD3.1 47.373,78.373 48.223,78.373 v1(48.85,79) ; v1(216.755,78.853) 216.757,78.85 231.35,78.85 v1(231.45,78.95)
  Bottom Layer w0.254: TP106.1 46.45,78.238 47.212,79 v1(48.85,79) ; R401_PD3.2@46.85,74.1 47.65,74.9 ; C401_PD3.1 48.25,74.3 47.65,74.9 ; v1(216.755,78.853) 215.522,80.086 50.086,80.086 48.925,78.925 48.85,78.85 48.85,76.1 47.65,74.9 ; U201.3@220.264,39.772 220.264,41.736 225.358,46.831 225.481,46.831 231.121,52.471 231.121,78.621 v1(231.45,78.95)
VIN6: OP301.6 OP301.7 TP107.1 U201.4 | length 46.2
  Top Layer w0.254: v1(221.05,41.25) 222.4,41.25 225.85,44.7 228.55,44.7 230.5,42.75 230.5,36.25 234.2,32.55 v1(234.2,31.25) ; v1(228.107,25.2) 228.107,26.907 228.65,27.45 230.45,27.45 v1(232.15,29.15)
  Bottom Layer w0.254: U201.4 220.792,39.882 220.792,40.868 221.05,41.126 v1(221.05,41.25) 221.089,41.289 221.089,41.987 223.737,44.635 227.387,44.635 TP107.1 ; 226.802,25.2 v1(228.107,25.2) ; v1(232.15,29.15) 234.2,31.2 v1(234.2,31.25)
VIN7: OP301.1 R302.2 TP108.1 U201.5 | length 36.6
  Bottom Layer w0.254: U201.5 221.29,40.498 221.292,40.5 v1(222.75,40.5) 225.6,43.35 229.101,43.35 229.25,43.201 229.25,39.7 ; OP301.1 224.31,24.452 223.217,24.452 222.45,25.219 222.45,29.05 223.9,30.5 226.457,30.5 226.557,30.6 226.557,33.817 229.25,36.51 229.25,39.7 ; TP108.1 229.322,39.772 229.25,39.7
pads on no net: OP301.9 P701.1 P702.1 P703.10 P704.10
copper on no net:
  other v2: 8,12 12,12 16,12 20,12 24,12 28,12 32,12 36,12 40,12 56,12 60,12 64,12 68,12 72,12 76,12 80,12 84,12 132,12 136,12 140,12 144,12 148,12 152,12 156,12 160,12 180,12 184,12 188,12 192,12 196,12 200,12 204,12 240,12 248,12 252,12 256,12 260,12 264,12 268,12 288,12 292,12 296,12 300,12 304,12 308,12 312,12 316,12 4,16 8,16 12,16 16,16 28,16 32,16 36,16 40,16 52,16 56,16 60,16 64,16 68,16 72,16 76,16 80,16 84,16 128,16 132,16 136,16 144,16 148,16 152,16 156,16 160,16 176,16 180,16 184,16 188,16 192,16 196,16 200,16 204,16 236,16 256,16 260,16 264,16 268,16 284,16 288,16 292,16 296,16 300,16 304,16 308,16 312,16 316,16 4,20 8,20 12,20 16,20 28,20 32,20 36,20 40,20 52,20 56,20 60,20 64,20 76,20 80,20 84,20 128,20 132,20 136,20 148,20 152,20 156,20 160,20 172,20 176,20 180,20 184,20 192,20 196,20 200,20 204,20 256,20 260,20 264,20 268,20 280,20 284,20 288,20 292,20 304,20 308,20 312,20 316,20 4,24 8,24 12,24 16,24 28,24 32,24 36,24 40,24 52,24 56,24 60,24 64,24 76,24 80,24 84,24 88,24 124,24 128,24 132,24 136,24 148,24 152,24 156,24 160,24 172,24 176,24 180,24 184,24 196,24 200,24 204,24 240,24 244,24 256,24 260,24 264,24 268,24 280,24 284,24 288,24 292,24 304,24 308,24 312,24 316,24 4,28 8,28 12,28 16,28 28,28 32,28 36,28 40,28 52,28 56,28 60,28 64,28 76,28 80,28 84,28 88,28 124,28 128,28 132,28 136,28 144,28 148,28 152,28 156,28 160,28 172,28 176,28 180,28 184,28 192,28 196,28 200,28 204,28 240,28 244,28 248,28 256,28 260,28 264,28 268,28 280,28 284,28 288,28 292,28 304,28 308,28 312,28 316,28 4,32 8,32 12,32 16,32 28,32 32,32 36,32 40,32 52,32 56,32 60,32 64,32 76,32 80,32 84,32 88,32 124,32 128,32 132,32 136,32 144,32 148,32 152,32 156,32 160,32 172,32 176,32 180,32 184,32 192,32 196,32 200,32 204,32 236,32 240,32 244,32 248,32 256,32 260,32 264,32 268,32 280,32 284,32 288,32 292,32 304,32 308,32 312,32 316,32 4,36 8,36 12,36 16,36 28,36 32,36 36,36 40,36 52,36 56,36 60,36 64,36 76,36 80,36 84,36 88,36 124,36 128,36 132,36 136,36 144,36 148,36 152,36 156,36 160,36 172,36 176,36 180,36 184,36 192,36 196,36 200,36 204,36 232,36 236,36 240,36 244,36 248,36 256,36 260,36 264,36 268,36 280,36 284,36 288,36 292,36 304,36 308,36 312,36 316,36 4,40 8,40 12,40 16,40 28,40 52,40 56,40 60,40 64,40 76,40 124,40 128,40 132,40 136,40 144,40 172,40 176,40 180,40 184,40 192,40 236,40 240,40 244,40 248,40 256,40 280,40 284,40 288,40 292,40 304,40 4,44 8,44 12,44 16,44 28,44 76,44 124,44 128,44 132,44 136,44 232,44 236,44 240,44 244,44 256,44 304,44 4,48 8,48 12,48 16,48 28,48 76,48 124,48 128,48 132,48 136,48 192,48 232,48 236,48 240,48 244,48 256,48 304,48 4,52 8,52 12,52 16,52 28,52 52,52 56,52 60,52 64,52 76,52 124,52 128,52 132,52 136,52 144,52 172,52 176,52 180,52 184,52 192,52 232,52 236,52 240,52 244,52 248,52 256,52 280,52 284,52 288,52 292,52 304,52 4,56 8,56 12,56 16,56 28,56 32,56 36,56 40,56 52,56 56,56 60,56 64,56 76,56 80,56 84,56 88,56 124,56 128,56 132,56 136,56 144,56 148,56 152,56 156,56 160,56 172,56 176,56 180,56 184,56 192,56 196,56 200,56 204,56 232,56 236,56 240,56 244,56 248,56 256,56 260,56 264,56 268,56 280,56 284,56 288,56 292,56 304,56 308,56 312,56 316,56 4,60 8,60 12,60 16,60 28,60 32,60 36,60 40,60 52,60 56,60 60,60 64,60 76,60 80,60 84,60 88,60 124,60 128,60 132,60 136,60 144,60 148,60 152,60 156,60 160,60 172,60 176,60 180,60 184,60 192,60 196,60 200,60 204,60 232,60 236,60 240,60 244,60 248,60 256,60 260,60 264,60 268,60 280,60 284,60 288,60 292,60 304,60 308,60 312,60 316,60 4,64 8,64 12,64 16,64 28,64 32,64 36,64 40,64 52,64 56,64 60,64 64,64 76,64 80,64 84,64 88,64 124,64 128,64 132,64 136,64 148,64 152,64 156,64 160,64 172,64 176,64 180,64 184,64 192,64 196,64 200,64 204,64 232,64 236,64 240,64 244,64 256,64 260,64 264,64 268,64 280,64 284,64 288,64 292,64 304,64 308,64 312,64 316,64 4,68 8,68 12,68 16,68 28,68 32,68 36,68 40,68 52,68 56,68 60,68 64,68 76,68 80,68 84,68 88,68 124,68 128,68 132,68 136,68 148,68 152,68 156,68 160,68 172,68 176,68 180,68 184,68 196,68 200,68 204,68 232,68 236,68 240,68 244,68 256,68 260,68 264,68 268,68 280,68 284,68 288,68 292,68 304,68 308,68 312,68 316,68 4,72 8,72 12,72 16,72 20,72 24,72 28,72 32,72 36,72 40,72 52,72 56,72 60,72 64,72 68,72 72,72 76,72 80,72 84,72 88,72 124,72 128,72 132,72 136,72 140,72 144,72 148,72 152,72 156,72 160,72 172,72 176,72 180,72 184,72 188,72 192,72 196,72 200,72 204,72 232,72 236,72 240,72 244,72 248,72 252,72 256,72 260,72 264,72 268,72 280,72 284,72 288,72 292,72 296,72 300,72 304,72 308,72 312,72 316,72 8,76 12,76 16,76 20,76 24,76 28,76 32,76 36,76 40,76 56,76 60,76 64,76 68,76 72,76 76,76 80,76 84,76 88,76 128,76 132,76 136,76 140,76 144,76 148,76 152,76 156,76 176,76 180,76 184,76 188,76 192,76 196,76 200,76 204,76 236,76 240,76 244,76 248,76 252,76 256,76 260,76 264,76 268,76 288,76 292,76 296,76 300,76 304,76 308,76 312,76 316,76
  other v3: 71.115,0.968 72.385,0.968 81.115,0.968 82.385,0.968 245.115,0.968 246.385,0.968 255.115,0.968 256.385,0.968 70.48,1.73 73.02,1.73 80.48,1.73 83.02,1.73 244.48,1.73 247.02,1.73 254.48,1.73 257.02,1.73 69.718,2.365 73.655,2.365 79.718,2.365 83.655,2.365 243.718,2.365 247.655,2.365 253.718,2.365 257.655,2.365 69.718,3.635 73.782,3.635 79.718,3.635 83.782,3.635 243.718,3.635 247.782,3.635 253.718,3.635 257.782,3.635 70.48,4.27 73.02,4.27 80.48,4.27 83.02,4.27 244.48,4.27 247.02,4.27 254.48,4.27 257.02,4.27 71.115,5.032 72.385,5.032 81.115,5.032 82.385,5.032 245.115,5.032 246.385,5.032 255.115,5.032 256.385,5.032

## Polygon pours and split planes (outlines as drawn)
GND on Top Layer "Top Layer-Signal_GND" (solid, remove dead copper, pour order 12): 333.3,87.65 1,87.65 0,86.65 0,0 332.65,0
V- on Top Layer "Bottom Layer-GND" (solid, remove dead copper, pour order 8): 216.25,10.65 212.95,13.95 209.6,13.95 206.25,10.65 131.2,10.65 126,15.85 125.95,16.5 125.95,19.943 122.743,23.15 90.35,23.15 85.7,18.5 85.7,10.65 0,10.65 0,0 327.6,0 327.6,10.65 327.5,10.65 327.45,10.65 327.45,14.65 320.5,14.65 316.5,10.65
GND on Bottom Layer "Bottom Layer-Signal_GND" (solid, remove dead copper, pour order 10): 331.35,0 330.7,0.65 330.7,87.05 1.4,87.05 0,85.65 0,0

## Keep-outs
Keep-Out Layer:
  lines w0.254: 327.47,0 252.26,0 252.26,5.94 252.21,5.99 249.25,5.99 249.25,0.01 120,0.01 120,17 92,17 92,0.01 78.23,0.01 78.23,5.99 75.26,5.99 75.24,5.97 75.24,0 0,0 0,81.009 327.5,80.999 327.5,-0.01 ; 30.25,40.5 42.45,40.5 42.45,51.5 30.25,51.5 30.25,40.5 ; 77.75,40.5 89.95,40.5 89.95,51.5 77.75,51.5 77.75,40.5 ; 102.5,51 108.5,51 108.5,78 102.5,78 102.5,51 ; 149.25,40.5 161.45,40.5 161.45,51.5 149.25,51.5 149.25,40.5 ; 196.75,40.5 208.95,40.5 208.95,51.5 196.75,51.5 196.75,40.5 ; 219.5,51 225.5,51 225.5,78 219.5,78 219.5,51 ; 259.25,40.5 271.45,40.5 271.45,51.5 259.25,51.5 259.25,40.5 ; 306.75,40.5 318.95,40.5 318.95,51.5 306.75,51.5 306.75,40.5

## Other copper
Top Layer:
  rectangle net NetPV603_2: 162.06,17.97 167.16,70.06
  rectangle net NetPV601_2: 272.07,17.98 277.17,70.07
  rectangle net V-: 209.45,10.29 213.3,71.95
  rectangle net V-: 90.4,18.85 96.18,72.2
  rectangle net NetPV605_2: 43.01,18.05 48.11,70.14
  rectangle net V-: 319.65,5.09 325.08,72.37
Bottom Layer:
  rectangle net V_out: 224.313,18.4 227,20.56
  rectangle net V-: 227.3,18.39 229.987,20.55
  rectangle net VIN6: 226.107,24.85 227.507,25.55
  rectangle net NetOP301_5: 228.657,22.75 229.807,27
  rectangle net V-: 229.841,6.9 232.15,10.35

## Silkscreen, mask and mechanical layers (free items; w line width, h text height)
Top Overlay:
  drawing of 3105 lines, arcs and shapes, not listed
  text "ANTIRAM" at 326.7,40 h2 r90
  text "RAM" at 1.7,37.2 h2 r90
  text "HYPERION: STARBOARD DEPLOYABLE" at 274.602,5.948 h3
  text "'.Print_Date'  V1.05 SVN XXXX" at 274.429,3.936 h2
  text "Nicholas J. Sorensen, Erik F. Halliwell" at 274.55,1.337 h2
  text "ZENITH" at 165.2,1.1 h2
Bottom Overlay:
  text "VIN2" at 281.5,79.5 h0.8
  text "VIN4" at 290.5,79.5 h0.8
  text "VIN3" at 173.4,78.5 h0.8
  text "VIN1" at 38.6,78 h0.8
  text "VIN0" at 157.5,77.7 h0.8
  text "VIN5" at 50.7,77 h0.8
  text "ANTIRAM" at 326.7,48.1 h2 r90
  text "VIN6" at 233.6,45.4 h0.8
  text "RAM" at 1.7,45.3 h2 r90
  text "VIN7" at 236.7,37.7 h0.8
  text "Test Points: / TP101-VIN0 / TP102-VIN1 / TP103-VIN2 / TP104-VIN3 / TP105-VIN4 / TP106-VIN5 / TP107-VIN6 / TP108-VIN7" at 218.365,16.6 h0.7
  text "GND" at 232.82,12.3 h0.7 r90
  text "VStarD+" at 225.47,12.2 h0.7 r90
  text "VStarD+" at 226.94,12.2 h0.7 r90
  text "VStarD-" at 228.41,12.2 h0.7 r90
  text "VStarD-" at 229.88,12.2 h0.7 r90
  text "3V3" at 231.35,12.2 h0.7 r90
  text "SPI_CLK" at 234.29,12.2 h0.7 r90
  text "SPI_MISO" at 235.76,12.2 h0.7 r90
  text "SPI_MOSI" at 237.23,12.2 h0.7 r90
  text "ADC_SPI_nCS_SD" at 238.7,12.2 h0.7 r90
  text "ZENITH" at 173.3,1.1 h2
Mechanical 1:
  lines w0.254: 327.47,0 252.26,0 252.26,5.94 252.21,5.99 249.25,5.99 249.25,0.01 120,0.01 120,17 92,17 92,0.01 78.23,0.01 78.23,5.99 75.26,5.99 75.24,5.97 75.24,0 0,0 0,81 327.5,81 327.5,-0.01 ; 30.25,40.5 30.25,51.5 42.45,51.5 42.45,40.5 30.25,40.5 ; 77.75,40.5 77.75,51.5 89.95,51.5 89.95,40.5 77.75,40.5 ; 149.25,40.5 149.25,51.5 161.45,51.5 161.45,40.5 149.25,40.5 ; 196.75,40.5 196.75,51.5 208.95,51.5 208.95,40.5 196.75,40.5 ; 259.25,40.5 259.25,51.5 271.45,51.5 271.45,40.5 259.25,40.5 ; 306.75,40.5 306.75,51.5 318.95,51.5 318.95,40.5 306.75,40.5
Top Assembly: